# Altium PCB ATLAS_XP2V5_sredjen_bom.PcbDoc (part 2 of 4)
Units mil, origin at the board's own origin, x right, y up, seen from the top; angles counter-clockwise.
Board outline 6380 x 9190 mil, 4 copper layers (Primary Component Side, Ground Plane, Power Plane, Secondary Component Side), stack 35.4 mil thick; 203 components, 228 nets, 1212 pads, 912 vias.
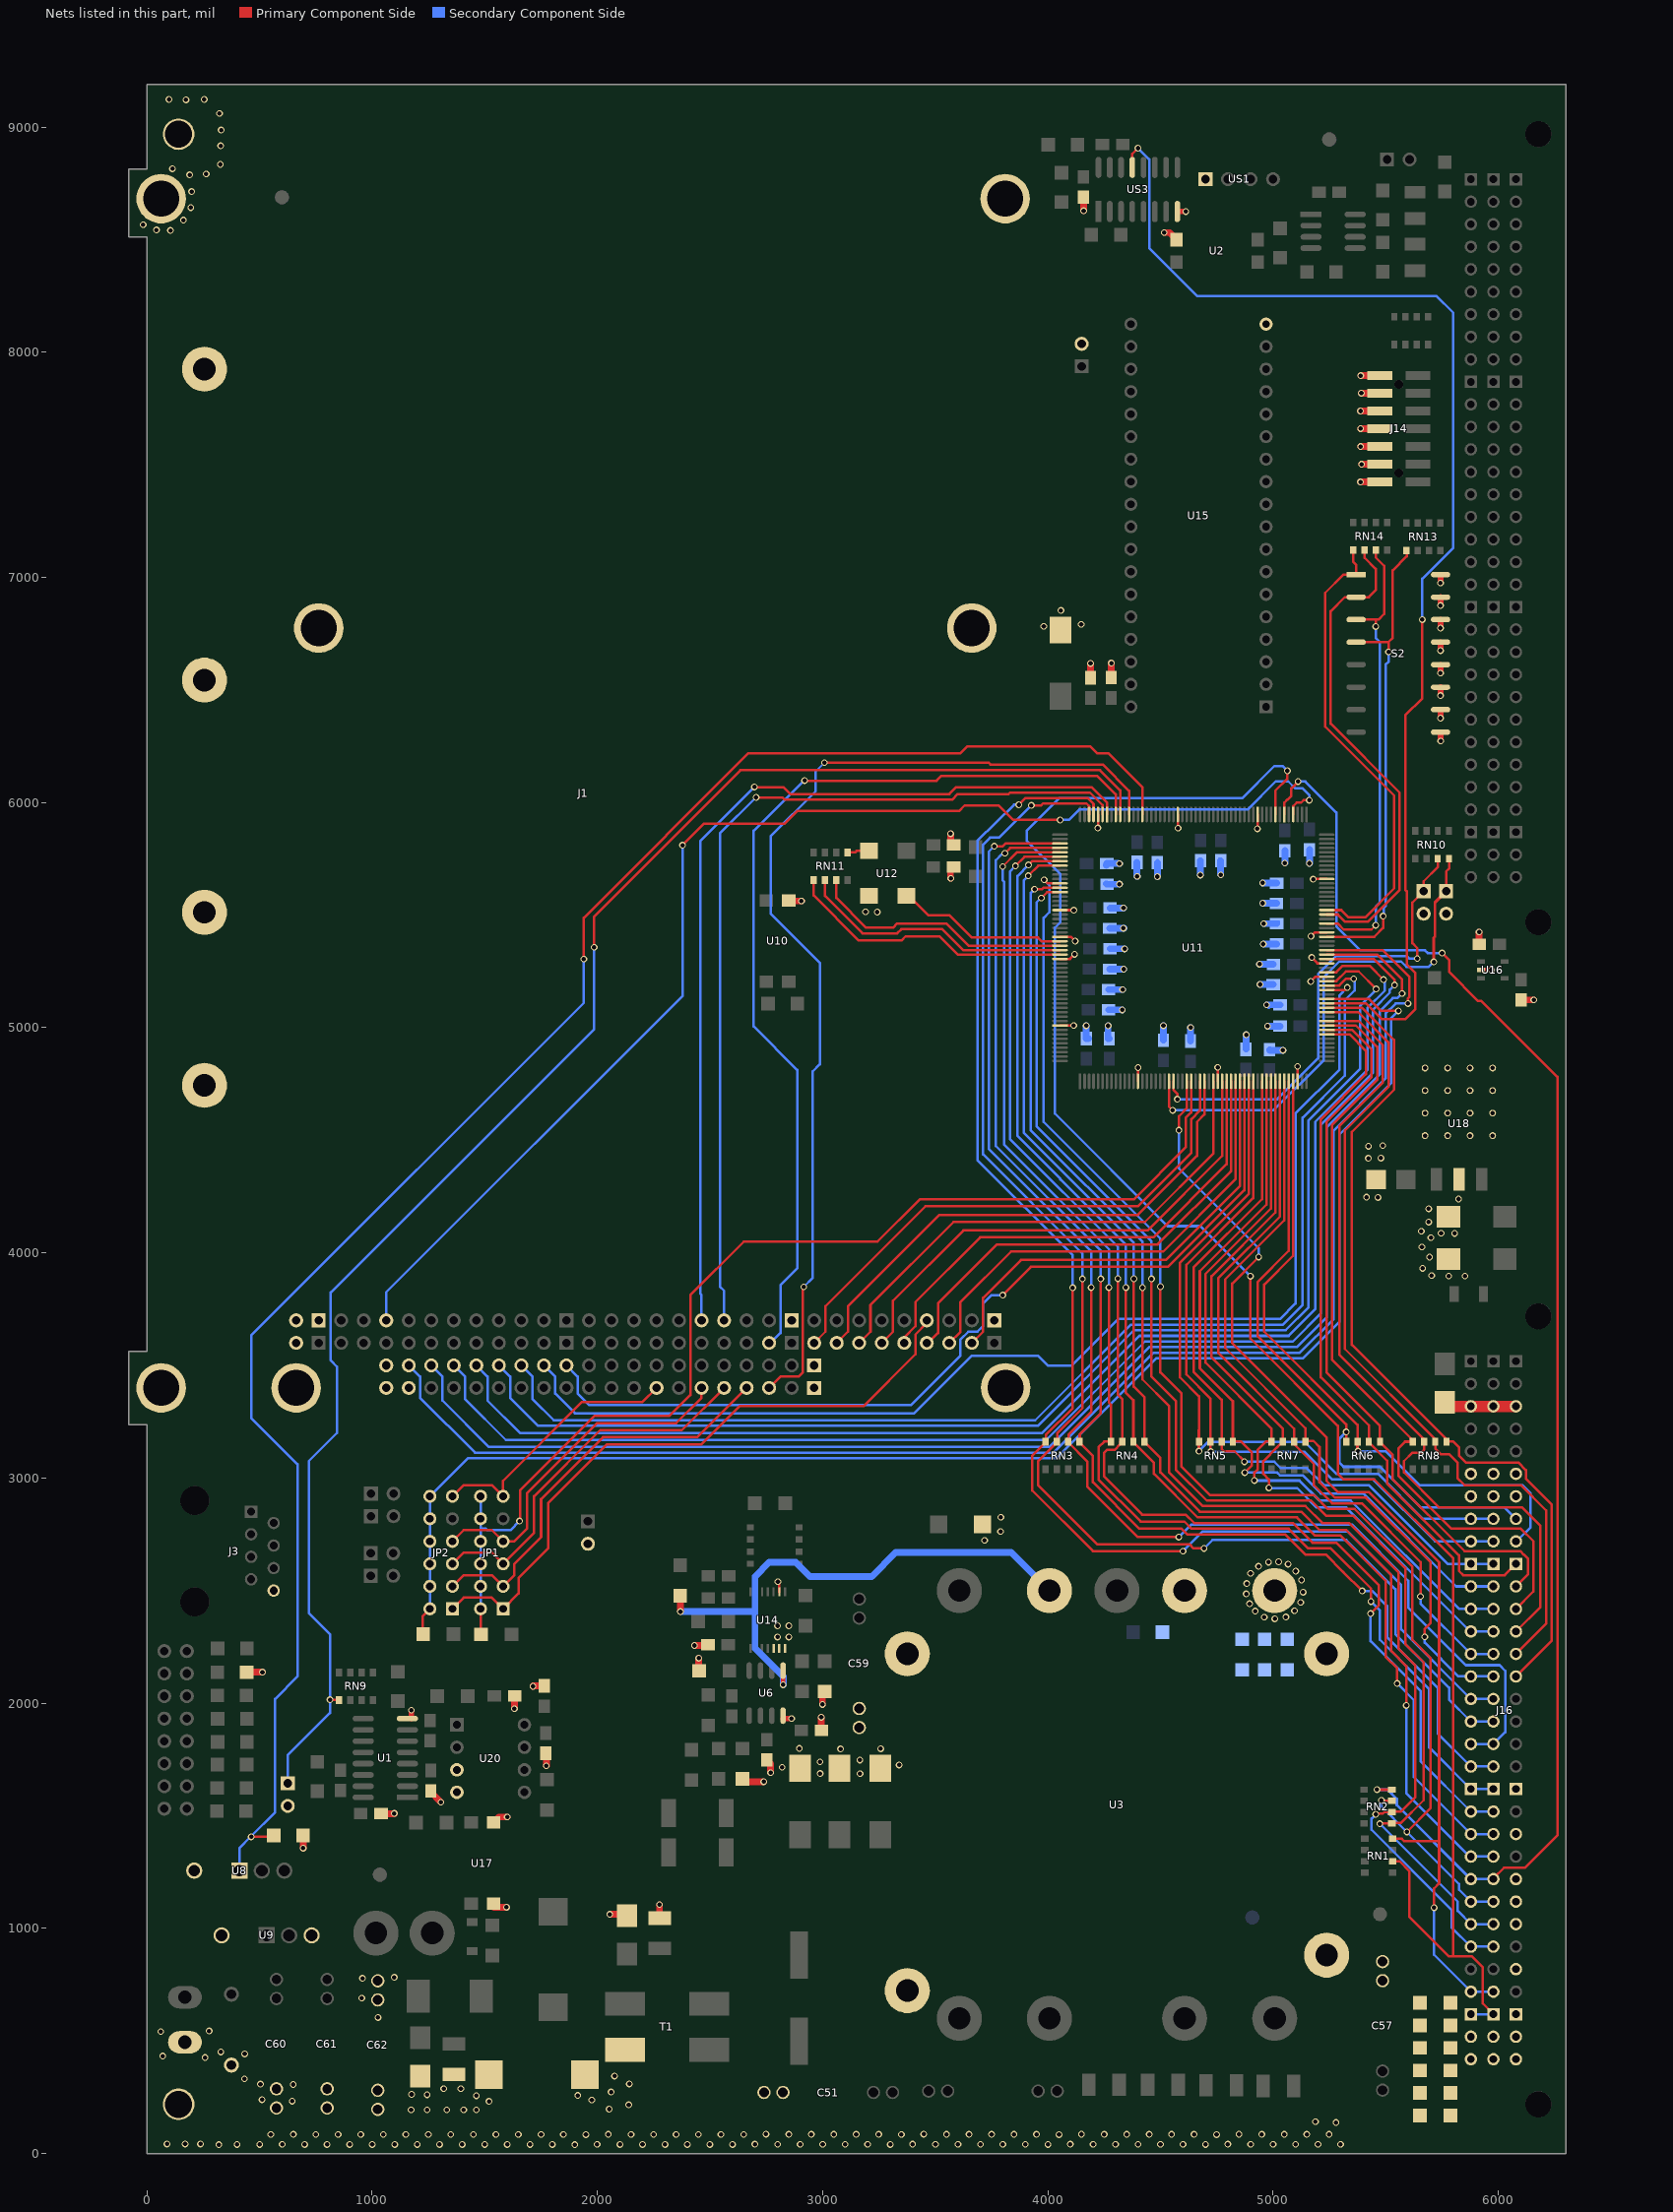
[diagram p4: the nets of this part, all layers, seen from the top]

## Via types
v1: diameter 30, hole 20, Primary Component Side to Secondary Component Side, 910 vias
v2: diameter 50, hole 28, Primary Component Side to Secondary Component Side, 2 vias

## Nets (pads, with @x,y where several pads share a name; then routed paths per layer and width w, separated by ;. In a path a pad name is that pad's centre, name@x,y a point inside that pad or via, vN(x,y) a via of type N, cw(c..) or ccw(c..) an arc to the next point about the centre after c; other vN are vias at no path point) (continued)
A2: RN13.5 S2.4 U11.81 | length 2144.4
  Primary Component Side w11: U11.81@5238.45,5404.1 5450,5404.1 5488.67,5442.77 v1(5488.67,5495.49) ; S2.4@5368.75,6712.5 5512.5,6712.5 ; v1(5512.5,6668.75) 5512.5,6712.5 ; RN13.5@5592.58,7118.82 5593.75,7119.75 5593.75,7093.75 5531.25,7031.25 5531.25,6731.25 5512.5,6712.5
  Secondary Component Side w11: v1(5488.67,5495.49) v1@5491,5489.99 ; v1(5512.5,6668.75) 5512.5,6625 5500,6612.5 5500,5540.25 5491,5531.25 v1@5491,5489.99 ; v1@5491,5489.99 5491.31,5489.25 5491,5489.25 v1@5491,5489.99
A3: RN14.7 S2.3 U11.84 | length 2044.5
  Primary Component Side w11: U11.84@5238.45,5463.2 5286.8,5463.2 5314,5436 5437,5436 v1(5456,5455) ; S2.3@5368.75,6812.5 5456,6812.5 ; v1(5456,6782) 5456,6812.5 ; RN14.7@5456.16,7121.18 5456.16,7088.68 5493.75,7051.09 5493.75,6837.5 5468.75,6812.5 5456,6812.5
  Secondary Component Side w11: v1(5456,5455) 5456,5537.5 5475,5556.5 5475,6712.5 5456,6731.5 v1(5456,6782)
A4: RN14.6 S2.2 U11.86 | length 2198
  Primary Component Side w11: U11.86@5238.45,5502.6 5287.5,5502.6 5320.1,5470 5420,5470 5562.5,5612.5 5562.5,6043.75 5256.25,6350 5256.25,6850 5318.75,6912.5 S2.2@5368.75,6912.5 5425,6912.5 5456.25,6943.75 5456.25,7037.5 5406.25,7087.5 RN14.6@5406.16,7121.18 RN14.6@5406.16,7121.18
A5: RN14.5 S2.1 U11.87 | length 2091.6
  Primary Component Side w11: U11.87@5238.45,5522.3 5302.7,5522.3 5335,5490 5408.75,5490 5537.5,5618.75 5537.5,6031.25 5231.25,6337.5 5231.25,6931.25 5312.5,7012.5 S2.1@5368.75,7012.5 5368.75,7056.25 5356.25,7068.75 5356.25,7087.5 5356.16,7087.59 RN14.5@5356.16,7121.18 RN14.5@5356.25,7119.75
ADDRESS_MAX_BUS0: J16.B16 J16.C16 RN3.8 U11.153 | length 6404.6
  Primary Component Side w11: v1(3871.02,5990.14) 3899.63,6018.75 4177.85,6018.75 4202.85,5993.75 U11.153@4202.85,5947.2 ; v1(4110.57,3845.26) 4110.57,3310.57 3991.6,3191.6 3991.6,3161.4 RN3.8@3990.2,3161.4 3990.2,3158.4 3931.25,3099.45 3931.25,2943.75 4200,2675 v1(4600,2675)
  Secondary Component Side w11: v1(3871.02,5990.14) 3850,5990.14 3687.5,5829.82 3687.5,4412.5 4110.48,3989.52 4110.48,3845.26 v1(4110.57,3845.26) ; v1(4600,2675) 4687.5,2762.5 5331.25,2762.5 5568.75,2525 5568.75,2328.25 J16.C16@5878.5,2018.5 J16.B16@5978.5,2018.5
ADDRESS_MAX_BUS1: J16.B17 J16.C17 RN3.7 U11.154 | length 6333.9
  Primary Component Side w11: v1(3927.06,5987.7) 3970.27,5987.7 3978.27,5995.7 4171.32,5995.7 4183.15,5983.87 U11.154@4183.15,5947.2 ; v1(4153.75,3884.68) 4153.75,3310 4041.6,3197.85 4041.6,3161.4 RN3.7@4040.2,3161.4 4040.2,3158.4 3956.25,3074.45 3956.25,2968.75 4218.75,2706.25 4628.19,2706.25 4646.94,2687.5 v1(4693.75,2687.5)
  Secondary Component Side w11: v1(3927.06,5987.7) 3783.11,5843.75 3743.75,5843.75 3712.5,5812.5 3712.5,4437.5 4153.61,3996.39 4153.61,3884.68 v1(4153.75,3884.68) ; v1(4693.75,2687.5) 4731.25,2725 5325,2725 5543.75,2506.25 5543.75,2306.25 5781.25,2068.75 5781.25,2015.75 J16.C17@5878.5,1918.5 J16.B17@5978.5,1918.5
ADDRESS_MAX_BUS2: J16.B18 J16.C18 RN3.6 U11.159 | length 6175.7
  Primary Component Side w11: v1(3762.5,5806.25) 3800,5806.25 3811.55,5817.8 U11.159@4053.75,5817.8 ; v1(4192.57,3845.86) 4192.57,3292.57 4091.6,3191.6 4091.6,3161.4 RN3.6@4090.2,3161.4 4090.2,3158.4 4175,3073.6 4175,2962.5 4399.97,2737.53 v1(4581.71,2737.53)
  Secondary Component Side w11: v1(3762.5,5806.25) 3737.5,5781.25 3737.5,4462.5 4192.61,4007.39 v1(4192.57,3845.86) ; v1(4581.71,2737.53) 4637.94,2793.75 5350,2793.75 5600,2543.75 5600,2425 5856.25,2168.75 6006.25,2168.75 6031.25,2143.75 6031.25,1871.25 J16.B18@5978.5,1818.5 J16.C18@5878.5,1818.5
ADDRESS_MAX_BUS3: J16.B19 J16.C19 RN3.5 U11.160 | length 5827.9
  Primary Component Side w11: v1(3809.25,5774.61) 3832.74,5798.1 U11.160@4053.75,5798.1 ; v1(4234.99,3884.2) 4234.99,3287.32 4141.6,3193.93 4141.6,3161.4 RN3.5@4140.2,3161.4 4140.2,3158.4 4200,3098.6 4200,2981.25 4406.25,2775 4593.75,2775 4618.75,2750 5053.67,2750 5143.75,2659.92 5233.83,2659.92 5311.57,2582.18 5311.81,2582.18 v1(5395.92,2498.07)
  Secondary Component Side w11: v1(3809.25,5774.61) 3793.75,5768.75 3768.75,5743.75 3768.75,4475 4235.17,4008.58 4235.17,3884.2 v1(4234.99,3884.2) ; v1(5395.92,2498.07) 5439.43,2498.07 5506.25,2431.25 5506.25,2293.75 5731.25,2068.75 5731.25,1865.75 J16.C19@5878.5,1718.5 J16.B19@5978.5,1718.5
ADDRESS_MAX_BUS4: J16.B20 J16.C20 RN4.8 U11.161 | length 5827.2
  Primary Component Side w11: v1(3799.34,5715.89) 3861.85,5778.4 U11.161@4053.75,5778.4 ; v1(4271.24,3846.16) 4271.24,3335.01 4279.91,3326.34 RN4.8@4279.91,3161.4 4250,3161.4 4225,3136.4 4225,2993.75 4412.5,2806.25 4606.25,2806.25 4637.5,2775 5068.75,2775 5156.25,2687.5 5256.25,2687.5 5434.92,2508.83 v1(5434.92,2451.12)
  Secondary Component Side w11: v1(3799.34,5715.89) 3799.34,5655 3805.61,5648.73 3805.61,4481.89 4271.62,4015.88 4271.62,3846.16 v1(4271.24,3846.16) ; v1(5434.92,2451.12) 5475,2411.04 5475,2281.25 5693.75,2062.5 5693.75,1803.25 J16.C20@5878.5,1618.5 J16.B20@5978.5,1618.5
ADDRESS_MAX_BUS5: J16.B21 J16.C21 RN4.7 U11.162 | length 5928.4
  Primary Component Side w11: v1(3856.45,5718.67) 3896.48,5758.7 U11.162@4053.75,5758.7 ; v1(4311.1,3885.11) 4311.47,3885.11 4311.47,3369.78 4329.91,3351.34 RN4.7@4329.91,3161.4 ; RN4.7@4329.91,3158.4 RN4.7@4329.91,3161.4 ; v1(5433.43,2398.03) 5468.75,2433.35 5468.75,2525 5281.25,2712.5 5175,2712.5 5087.5,2800 4650,2800 4612.5,2837.5 4418.75,2837.5 4250,3006.25 4250,3112.5 4262.5,3125 4296.51,3125 4321.41,3149.9 4321.41,3161.4 RN4.7@4329.91,3161.4
  Secondary Component Side w11: v1(3856.45,5718.67) 3831.25,5693.47 3831.25,4506.25 4311.53,4025.97 4311.53,3886.58 4311.47,3886.58 v1(4311.1,3885.11) ; v1(5433.43,2398.03) 5433.43,2275 5656.25,2052.18 5656.25,1740.75 J16.C21@5878.5,1518.5 J16.B21@5978.5,1518.5
ADDRESS_MAX_BUS6: J16.B22 J16.C22 RN4.6 U11.163 | length 5730
  Primary Component Side w11: v1(3914.41,5722.94) 3930.46,5739 U11.163@4053.75,5739 ; v1(4346.58,3846.16) 4346.58,3378.42 4379.91,3345.09 RN4.6@4379.91,3161.4 4379.91,3158.4 4471.38,3066.94 4471.38,3018.75 4665.12,2825 5106.25,2825 5187.5,2743.75 5300,2743.75 5500,2543.75 5500,2206.25 5550.74,2155.51 5550.74,2087.19 v1(5551.04,2087.48)
  Secondary Component Side w11: v1(3914.41,5722.94) 3865.37,5673.91 3865.37,4519.01 4055.83,4328.54 4055.83,4326.04 4346.92,4034.96 4346.92,3846.16 v1(4346.58,3846.16) ; v1(5551.04,2087.48) 5625,2013.52 5625,1672 J16.C22@5878.5,1418.5 J16.B22@5978.5,1418.5
ADDRESS_MAX_BUS7: J16.B23 J16.C23 RN4.5 U11.164 | length 5786.3
  Primary Component Side w11: v1(3913.18,5674.78) 3957.7,5719.3 U11.164@4053.75,5719.3 ; v1(4382.2,3884.81) 4381.9,3882.39 4381.9,3405.6 4429.91,3357.59 RN4.5@4429.91,3161.4 4429.91,3158.4 4500,3088.31 4500,3025 4675,2850 5125,2850 5206.25,2768.75 5325,2768.75 5525,2568.75 5525,2231.25 5591.19,2165.06 5591.19,1989.78 v1(5591.31,1989.78)
  Secondary Component Side w11: v1(3913.18,5674.78) 3893.75,5655.35 3893.75,4532.81 4381.91,4044.65 4381.91,3882.39 v1(4382.2,3884.81) ; v1(5591.31,1989.78) 5591.19,1918.68 5591.19,1601.15 5873.85,1318.5 J16.C23@5878.5,1318.5 J16.B23@5978.5,1318.5
ADJ: R41.2 U3.6 U6.5 | length 2471.8
  Primary Component Side w20: U6.5@2824.26,2144.45 2824.26,2081.76 v1(2824.66,2081.76)
  Primary Component Side w30: R41.2@2368.06,2477.16 2368.75,2477.16 v1(2368.75,2406.25)
  Secondary Component Side w30: v1(2368.75,2406.25) 2700,2406.25 ; v1(2824.66,2081.76) 2825,2081.76 2825,2118.75 2700,2243.75 2700,2406.25 ; U3.6@4007.09,2500 3838.09,2669 3324.5,2669 3218,2562.5 2943.75,2562.5 2881.25,2625 2762.5,2625 2700,2562.5 2700,2406.25
AEN: J1.A11 U11.148 | length 4243.2
  Primary Component Side w10.9: v1(2920,6098) 2921,6097 3506.25,6097 3528,6118.75 4218.75,6118.75 4301.35,6036.15 U11.148@4301.35,5947.2
  Secondary Component Side w10.9: J1.A11@2762.5,3600 2768.75,3600 2812.5,3643.75 2812.5,3856.25 2887.5,3931.25 2887.5,4812.5 2693.75,5006.25 2693.75,5875 2916.75,6098 v1(2920,6098)
ALE: J1.B28 U11.108 | length 5775.9
  Primary Component Side w10.9: v1(2378.14,5810.22) 2474.17,5906.25 2831.25,5906.25 2887.5,5962.5 3606.25,5962.5 3631.25,5987.5 3781.25,5987.5 3846.33,5922.42 3962.86,5922.42 v1(4054.58,5922.45) ; U11.108@5089.35,5947.2 5089.35,5983.87 5105.48,6000 5125,6000 5135.02,6010.02 v1(5160.51,6010.02)
  Secondary Component Side w10.9: J1.B28@1062.5,3700 1062.5,3825 2378,5140.5 2378,5810.22 v1(2378.14,5810.22) ; v1(4054.58,5922.45) 4093.2,5922.45 4139.51,5968.75 4887.5,5968.75 5012.5,6093.75 5067.49,6093.75 5098.74,6062.5 5131.25,6062.5 5160.51,6033.24 v1(5160.51,6010.02)
BALE: J16.B25 J16.C25 RN2.7 U11.168 | length 6183.7
  Primary Component Side w10.9: v1(3983.78,5656.47) 3984.66,5654.72 3998.88,5640.5 U11.168@4053.75,5640.5 ; v1(4499.99,3849.79) 4499.99,3468.76 4593.75,3375 4593.75,3050 4718.75,2925 5181.25,2925 5243.75,2862.5 5362.5,2862.5 5618.75,2606.25 5618.75,2281.25 5700,2200 5700,1534.17 v1(5594.19,1428.36) ; v1@5481.24,1568.13 v1(5481.25,1568.75) 5485.57,1565.82 RN2.7@5527.38,1565.82
  Secondary Component Side w10.9: v1(3983.78,5656.47) 3984.66,5654.72 4006.25,5633.13 4006.25,5512.5 3981.25,5487.5 3981.25,4581.25 4499.16,4063.34 4499.16,3849.79 v1(4499.99,3849.79) ; v1(5481.25,1568.75) 5481.25,1541.3 v1(5594.19,1428.36) 5826,1196.55 5826,1171 J16.C25@5878.5,1118.5 J16.B25@5978.5,1118.5
BASE_ADDR_JP0: J11.1 RN10.8 U11.21 | length 2291.8
  Primary Component Side w11: U11.21@4537.75,4762.5 4537.75,4649.24 v1(4554.25,4632.74) ; J11.1@5768.75,5606.25 5768.75,5693.75 5781.25,5706.25 5781.25,5751 RN10.8@5781.05,5751.1
  Primary Component Side w12: v1(5713.93,5292.53) 5713.93,5400 5718.75,5404.82 5718.75,5556.25 J11.1@5768.75,5606.25
  Secondary Component Side w11: v1(4554.25,4632.74) 5001.49,4632.74 5225,4856.25 5225,5225 5293.75,5293.75 5569,5293.75 5592.72,5270.03 5691.43,5270.03 v1(5713.93,5292.53)
BASE_ADDR_JP1: J13.1 RN10.7 U11.22 | length 2140.2
  Primary Component Side w11: U11.22@4557.45,4762.5 4557.45,4723.82 4575.02,4706.25 v1(4575.02,4682.36) ; v1(5640.2,5306.67) 5640.2,5353.55 5618.75,5375 5618.75,5556.25 J13.1@5668.75,5606.25 5668.75,5650 5731.25,5712.5 5731.25,5751 RN10.7@5731.05,5751.1
  Secondary Component Side w11: v1(4575.02,4682.36) 5018.75,4682.36 5200,4863.61 5200,5237.5 5281.25,5318.75 5593.75,5318.75 5605.83,5306.67 v1(5640.2,5306.67)
BIQ_1: J16.B29 J16.C29 RN1.8 U11.25 | length 5103
  Primary Component Side w11: v1(4581.97,4544.82) 4581.97,4606.97 4616.55,4641.55 U11.25@4616.55,4762.5 ; v1(4936.28,3981.24) 4936.22,3981.3 4818.75,3863.84 4818.75,3598.99 5237.5,3180.24 5237.5,2987.5 5287.5,2937.5 5425,2937.5 5737.5,2625 5737.5,1387.5 ; RN1.8@5530.79,1397.4 5571.34,1397.41 5581.25,1387.5 5737.5,1387.5 ; v1(5714.88,1091.42) 5714.88,1177.38 5737.5,1200 5737.5,1387.5
  Secondary Component Side w11: v1(4581.97,4544.82) 4581.97,4375 4936.28,4020.69 v1(4936.28,3981.24) ; v1(5714.88,1091.42) 5714.88,882.12 J16.C29@5878.5,718.5 J16.B29@5978.5,718.5
BIQ_2: J16.B30 J16.C30 RN1.6 U11.112 | length 8515.1
  Primary Component Side w11: v1(4899.42,3896.24) 4899.42,3619.33 5287.5,3231.25 5287.5,3018.75 5312.5,2993.75 5450,2993.75 5800,2643.75 5800,875 ; U11.112@5010.55,5947.2 5010.55,6053.08 5063.64,6106.17 v1(5063.64,6140.9) ; RN1.6@5530.79,1297.4 5562.5,1297.41 5606.25,1253.66 5606.25,1049.69 5780.94,875 5800,875 ; J16.B30@5978.5,618.5 5931.25,665.75 5931.25,827.27 5883.52,875 5800,875
  Secondary Component Side w11: v1(4899.42,3896.24) 4676.92,4118.75 4531.25,4118.75 4031.25,4618.75 4031.25,5443.75 4056.25,5468.75 4056.25,5681.25 3906.25,5831.25 3906.25,5875 4050,6018.75 4862.5,6018.75 5006.25,6162.5 5042.04,6162.5 v1(5063.64,6140.9) ; J16.C30@5878.5,618.5 J16.B30@5978.5,618.5
BRD: J16.B27 J16.C27 RN2.6 U11.169 | length 6287.2
  Primary Component Side w10.9: v1(3941.07,5615.31) 3975,5615.31 3980.49,5620.8 U11.169@4053.75,5620.8 ; v1(4420.41,3845.56) 4420.41,3437.75 4537.5,3320.66 4537.5,3025 4687.5,2875 5143.75,2875 5218.75,2800 5337.5,2800 5556.25,2581.25 5556.25,2243.75 5631.25,2168.75 5631.25,1581.25 5568.75,1518.75 5527.38,1518.75 RN2.6@5527.38,1515.82 5527.12,1516.09 5494.75,1516.09 5487.25,1508.59 5456.25,1508.59 v1(5456.25,1506.25)
  Secondary Component Side w10.9: v1(3941.07,5615.31) 3925,5599.25 3925,4543.75 4420.66,4048.09 4420.66,3845.56 v1(4420.41,3845.56) ; v1(5456.25,1506.25) 5437.5,1487.5 5437.5,1437.5 5793,1082 5793,1004 J16.C27@5878.5,918.5 J16.B27@5978.5,918.5
BRDY: J16.B24 J16.C24 RN2.8 U11.110 | length 6693.7
  Primary Component Side w11: U11.110@5049.95,5947.2 5049.95,5999.62 5062.82,6012.5 5064.24,6012.5 5081.25,6029.51 5081.25,6062.9 v1(5111.45,6093.09) ; v1(5750.53,5331.71) 5781.25,5300.99 5781.25,5248.22 5910.72,5118.75 5925,5118.75 6262.5,4781.25 6262.5,1412.5 6118.75,1268.75 6025,1268.75 5978.5,1222.25 J16.B24@5978.5,1218.5
  Primary Component Side w12: v1@5462.5,1616.09 v1(5461.69,1616.09) 5461.69,1615.82 RN2.8@5527.38,1615.82
  Secondary Component Side w11: v1(5111.45,6093.09) 5143.75,6093.09 5281.25,5955.59 5281.25,5450 5387.5,5343.75 5675,5343.75 5687.04,5331.71 v1(5750.53,5331.71) ; J16.C24@5878.5,1218.5 J16.B24@5978.5,1218.5
  Secondary Component Side w12: v1(5461.69,1616.09) 5508.91,1616.09 5550,1575 5550,1547 J16.C24@5878.5,1218.5
BWR: J16.B26 J16.C26 RN2.5 U11.170 | length 6116.4
  Primary Component Side w10.9: v1(3971,5576) 3996.1,5601.1 U11.170@4053.75,5601.1 ; v1(4460.57,3884.51) 4460.57,3450.18 4568.75,3342 4568.75,3037.5 4706.25,2900 5168.75,2900 5237.5,2831.25 5356.25,2831.25 5587.5,2600 5587.5,2262.5 5668.75,2181.25 5668.75,1568.75 5568.75,1468.75 5527.38,1468.75 RN2.5@5527.38,1465.82 v1@5474.2,1465.82 ; v1(5474.2,1464.14) v1@5474.2,1465.82 ; v1@5474.2,1466.09 v1@5474.2,1465.82
  Secondary Component Side w10.9: v1(3971,5576) 3969.75,5576 3950,5556.25 3950,4562.5 4460.75,4051.75 4460.75,3884.51 v1(4460.57,3884.51) ; v1(5474.2,1464.14) 5820,1118.34 5820,1077 J16.C26@5878.5,1018.5 J16.B26@5978.5,1018.5
CLK0: U11.181 U12.3 | length 770.9
  Primary Component Side w10.9: U12.3@3371.33,5586.04 3371.33,5589.53 3378.83,5589.53 3468.36,5500 3562.5,5500 3662.5,5400 3956.25,5400 3971.85,5384.4 U11.181@4053.75,5384.4
CLK1: RN11.3 U11.182 | length 1175.5
  Primary Component Side w11: RN11.3@3060.8,5655.49 3060.8,5576 3193.05,5443.75 3312.5,5443.75 3331.25,5462.5 3550,5462.5 3647.8,5364.7 U11.182@4053.75,5364.7
CLK2: RN11.2 U11.183 | length 1228.4
  Primary Component Side w11: RN11.2@3010.8,5655.49 3010.8,5585 3177.05,5418.75 3331.25,5418.75 3350,5437.5 3531.25,5437.5 3623.75,5345 U11.183@4053.75,5345
CLK3: RN11.1 U11.184 | length 1285.4
  Primary Component Side w11: RN11.1@2960.8,5655.49 2960.8,5587 3160.3,5387.5 3350,5387.5 3368.75,5406.25 3518.75,5406.25 3599.7,5325.3 U11.184@4053.75,5325.3
CW6: JP4.1 RN9.5 U11.147 | length 7305.2
  Primary Component Side w11: v1(812.74,2015.09) 812.74,2013.71 853.08,2013.71 RN9.5@853.08,2013.48 ; v1(1985.3,5357.22) 1985.3,5493.75 2635.3,6143.75 4231.25,6143.75 4321.05,6053.95 U11.147@4321.05,5947.2
  Secondary Component Side w11: JP4.1@625,1643.75 625,1768.75 812.74,1956.49 v1(812.74,2015.09) 812.74,2306.01 718.75,2400 718.75,3075 843.75,3200 843.75,3494.25 816,3522 816,3824 1985.3,4993.3 v1(1985.3,5357.22)
CW7_W/C: R12.1 U8.1 U11.142 | length 8135
  Primary Component Side w11: v1(462.5,1406.25) 562.5,1406.25 R12.1@562.5,1412.5 ; v1(1939.8,5305.01) 1939.8,5487.5 2671.05,6218.75 3612.5,6218.75 3643.75,6250 4187.5,6250 4218.75,6218.75 4268.75,6218.75 4419.55,6067.95 U11.142@4419.55,5947.2
  Secondary Component Side w11: U8.1@410,1256.25 410,1356.1 v1@461.33,1407.42 ; v1(462.5,1406.25) v1@461.33,1407.42 ; v1(1939.8,5305.01) 1939.8,5110.32 463,3633.52 463,3266.75 668.75,3061 668.75,2118.75 568.75,2018.75 568.75,1514.85 v1@461.33,1407.42
DATA_ISA0: J1.A9 U11.28 | length 2424.9
  Primary Component Side w11: J1.A9@2962.5,3600 3012.5,3650 3012.5,3762.5 3456.25,4206.25 4400,4206.25 4637.5,4443.75 4637.5,4593.75 4675.65,4631.9 U11.28@4675.65,4762.5
DATA_ISA1: J1.A8 U11.29 | length 2355.1
  Primary Component Side w11: J1.A8@3062.5,3600 3112.5,3650 3112.5,3762.5 3518.75,4168.75 4400,4168.75 4662.5,4431.25 4662.5,4581.25 4695.35,4614.1 U11.29@4695.35,4762.5
DATA_ISA2: J1.A7 U11.31 | length 2311.7
  Primary Component Side w11: J1.A7@3162.5,3600 3212.5,3650 3212.5,3768.75 3581.25,4137.5 4431.25,4137.5 4734.75,4441 U11.31@4734.75,4762.5
DATA_ISA3: J1.A6 U11.33 | length 2268.3
  Primary Component Side w11: J1.A6@3262.5,3600 3312.5,3650 3312.5,3787.5 3625,4100 4443.75,4100 4774.15,4430.4 U11.33@4774.15,4762.5
DATA_ISA4: J1.A5 U11.34 | length 2205.7
  Primary Component Side w11: J1.A5@3362.5,3600 3362.5,3625 3412.5,3675 3412.5,3781.25 3700,4068.75 4468.75,4068.75 4793.85,4393.85 U11.34@4793.85,4762.5
DATA_ISA5: J1.A4 U11.35 | length 2143.4
  Primary Component Side w11: J1.A4@3462.5,3600 3468.75,3600 3512.5,3643.75 3512.5,3775 3775,4037.5 4487.83,4037.5 4812.25,4361.92 4813.55,4363.22 U11.35@4813.55,4762.5
DATA_ISA6: J1.A3 U11.36 | length 2084.6
  Primary Component Side w11: J1.A3@3562.5,3600 3612.5,3648.75 3612.5,3781.25 3837.5,4006.25 4512.5,4006.25 4833.25,4327 U11.36@4833.25,4762.5
DATA_ISA7: J1.A2 U11.37 | length 2032.7
  Primary Component Side w11: J1.A2@3662.5,3600 3712.5,3650 3712.5,3800 3881.25,3968.75 4525,3968.75 4852.95,4296.7 U11.37@4852.95,4762.5
DATA_ISA8: J1.C11 U11.38 | length 4106.6
  Primary Component Side w11: v1(3800,3812.5) 3925,3937.5 4532.16,3937.5 4872.65,4277.99 U11.38@4872.65,4762.5
  Secondary Component Side w11: J1.C11@1862.5,3500 1912.5,3450 1912.5,3375 1962.5,3325 3393.75,3325 3612.5,3543.75 3612.5,3615.76 3646.74,3650 3687.5,3650 3712.5,3675 3712.5,3775 3750,3812.5 v1(3800,3812.5)
DATA_ISA9: J1.C12 U11.69 | length 5302.2
  Primary Component Side w11: U11.69@5238.45,5167.7 5318.92,5167.7 v1(5329.78,5178.56)
  Secondary Component Side w11: J1.C12@1762.5,3500 1812.5,3450 1812.5,3375 1900,3287.5 3406.25,3287.5 3662.5,3543.75 3956.25,3543.75 4000,3500 4106.25,3500 4312.5,3706.25 5031.25,3706.25 5100,3775 5100,4618.75 5293.75,4812.5 5293.75,5142.53 v1(5329.78,5178.56)
DATA_ISA10: J1.C13 U11.70 | length 5519.4
  Primary Component Side w11: U11.70@5238.45,5187.4 5293.75,5187.4 5323.95,5217.6 v1(5357.95,5217.6)
  Secondary Component Side w11: J1.C13@1662.5,3500 1712.5,3450 1712.5,3350 1806.25,3256.25 3943.75,3256.25 4368.75,3681.25 5043.75,3681.25 5131.25,3768.75 5131.25,4600 5318.75,4787.5 5318.75,5121.69 5362.5,5165.44 5362.5,5211.9 5360.07,5214.33 5359.74,5214.01 v1(5357.95,5217.6)
DATA_ISA11: J1.C14 U11.71 | length 5788.6
  Primary Component Side w11: U11.71@5238.45,5207.1 5281.25,5207.1 5324.15,5250 5379.93,5250 v1(5457.77,5172.16)
  Secondary Component Side w11: J1.C14@1562.5,3500 1612.5,3450 1612.5,3356.25 1737.5,3231.25 3956.25,3231.25 4381.25,3656.25 5056.25,3656.25 5156.25,3756.25 5156.25,4587.5 5387.5,4818.75 5387.5,5097.52 5458.49,5168.5 5458.49,5172.16 v1(5457.77,5172.16)
DATA_ISA12: J1.C15 U11.73 | length 6022.9
  Primary Component Side w11: U11.73@5238.45,5246.5 5281.25,5246.5 5309.75,5275 5428.75,5275 5490.13,5212.88 5490.51,5212.5 v1(5490.51,5213.25)
  Secondary Component Side w11: J1.C15@1462.5,3500 1512.5,3450 1512.5,3343.75 1656.25,3200 3975,3200 4406.25,3631.25 5068.75,3631.25 5187.5,3750 5187.5,4581.25 5418.75,4812.5 5418.75,5087.5 5496.14,5164.89 5496.14,5205.25 v1(5490.51,5213.25)
DATA_ISA13: J1.C16 U11.76 | length 6235.5
  Primary Component Side w11: U11.76@5238.45,5305.6 5446.63,5305.6 5539.07,5213.16 5539.07,5189.46 v1(5539.55,5189.46)
  Secondary Component Side w11: J1.C16@1362.5,3500 1412.5,3450 1412.5,3350 1593.75,3168.75 3993.75,3168.75 4431.25,3606.25 5087.5,3606.25 5212.5,3731.25 5212.5,4568.75 5443.75,4800 5443.75,5081.25 5518.75,5156.25 5518.75,5168.66 v1(5539.55,5189.46)
DATA_ISA14: J1.C17 U11.77 | length 6459.6
  Primary Component Side w11: U11.77@5238.45,5325.3 5462.5,5325.3 5573.08,5214.72 v1(5573.08,5151.88)
  Secondary Component Side w11: J1.C17@1262.5,3500 1312.5,3450 1312.5,3343.75 1518.75,3137.5 4006.25,3137.5 4450,3581.25 5106.25,3581.25 5237.5,3712.5 5237.5,4556.25 5475,4793.75 5475,5075 5531.25,5131.25 5552.45,5131.25 v1(5573.08,5151.88)
DATA_ISA15: J1.C18 U11.78 | length 6675.5
  Primary Component Side w11: U11.78@5238.45,5345 5486.25,5345 5606.25,5225 5606.25,5137.5 5599.16,5130.41 v1(5599.16,5107.24)
  Secondary Component Side w11: J1.C18@1162.5,3500 1212.5,3450 1212.5,3356.25 1456.25,3112.5 4025,3112.5 4468.75,3556.25 5118.75,3556.25 5268.75,3706.25 5268.75,4543.75 5500,4775 5500,5062.5 5544.74,5107.24 v1(5599.16,5107.24)
DATA_MAX_BUS0: J16.B8 J16.C8 RN5.8 U11.39 | length 3271.4
  Primary Component Side w11: RN5.8@4671.5,3161.4 4670.67,3162.24 4670.67,3212.34 4670.83,3212.5 4670.83,3363.17 4587.5,3446.5 4587.5,3956.25 4892.35,4261.1 U11.39@4892.35,4762.5
  Primary Component Side w12: v1(4670.94,3119.14) 4670.94,3160.41 4671.5,3160.41 RN5.8@4671.5,3161.4
  Secondary Component Side w11: 4712.21,3160.41 5139.59,3160.41 5281.25,3018.75 5465.49,3018.75 5665.74,2818.5 J16.C8@5878.5,2818.5 J16.B8@5978.5,2818.5
  Secondary Component Side w12: v1(4670.94,3119.14) 4712.21,3160.41
DATA_MAX_BUS1: J16.B9 J16.C9 RN5.7 U11.40 | length 3233.6
  Primary Component Side w11: RN5.7@4721.5,3161.4 4721.5,3353.5 4615,3460 4615,3946.25 4912.05,4243.3 U11.40@4912.05,4762.5
  Primary Component Side w12: RN5.7@4721.5,3161.4 4721.5,3118.92 v1(4723.54,3116.88)
  Secondary Component Side w11: v1(4723.54,3116.88) 5139.37,3116.88 5262.5,2993.75 5444.67,2993.75 5719.92,2718.5 J16.C9@5878.5,2718.5 J16.B9@5978.5,2718.5
DATA_MAX_BUS2: J16.B10 J16.C10 RN5.6 U11.42 | length 3235.4
  Primary Component Side w11: v1(4872.83,3072.1) 4875.67,3072.1 4829.02,3118.75 4781.65,3118.75 4771.5,3128.9 RN5.6@4771.5,3161.4 4771.5,3347.25 4647,3471.75 4647,3934.5 4951.45,4238.95 U11.42@4951.45,4762.5
  Secondary Component Side w11: v1(4872.83,3072.1) 5006.25,3072.1 5034.6,3043.75 5150,3043.75 5225,2968.75 5424.56,2968.75 5774.81,2618.5 J16.C10@5878.5,2618.5 J16.B10@5978.5,2618.5
DATA_MAX_BUS3: J16.B11 J16.C11 RN5.5 U11.43 | length 3304.6
  Primary Component Side w11: RN5.5@4821.5,3161.4 RN5.5@4821.5,3162.5 ; v1(4874.74,3023.96) 4906.25,3055.47 4906.25,3112.5 4856.25,3162.5 RN5.5@4821.5,3162.5 ; U11.43@4971.15,4762.5 4971.15,4214.9 4675,3918.75 4675,3487.5 4821.5,3341 RN5.5@4821.5,3162.5
  Secondary Component Side w11: v1(4874.74,3023.96) 5018.75,3023.96 5030.21,3012.5 5131.25,3012.5 5212.5,2931.25 5400,2931.25 5812.75,2518.5 J16.C11@5878.5,2518.5 J16.B11@5978.5,2518.5
DATA_MAX_BUS4: J16.B12 J16.C12 RN7.8 U11.44 | length 3359.5
  Primary Component Side w11: v1(4917.35,2988.92) 4917.35,3023.6 4931.25,3037.5 4931.25,3123.9 4968.75,3161.4 RN7.8@4993.76,3161.4 4993.75,3218.75 4700,3512.5 4700,3906.25 4990.85,4197.1 U11.44@4990.85,4762.5
  Secondary Component Side w11: 5344.76,2900 5826.26,2418.5 J16.C12@5878.5,2418.5 J16.B12@5978.5,2418.5
  Secondary Component Side w12: v1(4917.35,2988.92) 5117.33,2988.92 5206.25,2900 5344.76,2900
DATA_MAX_BUS5: J16.B13 J16.C13 RN7.7 U11.45 | length 3363.8
  Primary Component Side w11: v1(4981.25,2956.25) 4981.25,2993.75 4956.25,3018.75 4956.25,3073.8 5018.75,3136.3 5018.75,3136.39 RN7.7@5043.76,3161.4 5043.75,3218.75 4727,3535.5 4727,3895.75 5010.55,4179.3 U11.45@5010.55,4762.5
  Secondary Component Side w11: v1(4981.25,2956.25) 4981.25,2954.75 5107.75,2954.75 5193.75,2868.75 5325,2868.75 5875.25,2318.5 J16.C13@5878.5,2318.5 J16.B13@5978.5,2318.5
DATA_MAX_BUS6: J16.B14 J16.C14 RN7.6 U11.46 | length 3299.2
  Primary Component Side w11: U11.46@5030.25,4762.5 5030.25,4160.89 4756.25,3886.89 4756.25,3556.25 5093.75,3218.75 RN7.6@5093.76,3161.4 5093.76,3150 5181.25,3062.51 5181.25,2968.75 5262.5,2887.5 5393.75,2887.5 5654.53,2626.72 v1(5654.53,2473.93)
  Secondary Component Side w11: v1(5654.53,2473.93) 5654.53,2442.47 J16.C14@5878.5,2218.5 J16.B14@5978.5,2218.5
DATA_MAX_BUS7: J16.B15 J16.C15 RN7.5 U11.47 | length 3466.8
  Primary Component Side w11: U11.47@5049.95,4762.5 5049.95,4144.97 4787.5,3882.52 4787.5,3577.62 5143.75,3221.37 RN7.5@5143.76,3161.4 5143.76,3164.85 5178.9,3164.85 5206.25,3137.5 5206.25,2981.25 5275,2912.5 5412.5,2912.5 5699.72,2625.28 5699.72,2356.25 5673.42,2329.95 5673.42,2294.42 v1(5673.32,2294.42)
  Secondary Component Side w11: v1(5673.32,2294.42) 5673.32,2268.75 5823.57,2118.5 J16.C15@5878.5,2118.5 J16.B15@5978.5,2118.5
DATA_MAX_BUS8: J16.A8 RN6.8 U11.48 | length 2858.9
  Primary Component Side w11: U11.48@5069.65,4762.5 5069.65,4008.85 4931.25,3870.45 4931.25,3631.56 5325,3237.81 v1(5325.04,3204.65) ; RN6.8@5325,3161.4 RN6.8@5325.05,3161.4
  Primary Component Side w12: RN6.8@5325.05,3161.4 v1@5325.05,3204.65
  Secondary Component Side w11: 5656.25,2868.75 6028.25,2868.75 J16.A8@6078.5,2818.5
  Secondary Component Side w12: v1(5325.04,3204.65) 5293.75,3173.37 5293.75,3068.75 5312.5,3050 5475,3050 5656.25,2868.75
DATA_MAX_BUS9: J16.A9 RN6.7 U11.49 | length 2970.2
  Primary Component Side w11: U11.49@5089.35,4762.5 5089.35,3987.3 4961.05,3859 4961.05,3650 5375,3236.05 5375,3161.4 RN6.7@5375.05,3161.4
  Primary Component Side w12: RN6.7@5375.05,3161.4 v1@5375.05,3117.45 ; v1(5377.54,3119.36) v1@5375.05,3117.45 ; v1@5375.05,3117.45 5375.05,3112.5 5375,3112.5 5372.63,3115.58 5375,3117.41 v1@5375.05,3117.45
  Secondary Component Side w11: v1(5377.54,3119.36) 5499.37,3119.38 5650,2968.75 6106.25,2968.75 6143.75,2931.25 6143.75,2781.25 6081,2718.5 J16.A9@6078.5,2718.5
DATA_MAX_BUS10: J16.A10 RN6.6 U11.59 | length 3132.6
  Primary Component Side w11: U11.59@5238.45,4970.7 5339,4970.7 5412.5,4897.2 5412.5,4793.75 5212.5,4593.75 5212.5,3446.88 5425,3234.38 5425,3161.4 RN6.6@5425.05,3161.4 ; RN6.6@5425.05,3158.4 5506.25,3077.2 5506.25,2975 5825,2656.25 5825,2587.5 5843.75,2568.75 6028.75,2568.75 J16.A10@6078.5,2618.5
  Primary Component Side w12: RN6.6@5425.05,3158.4 RN6.6@5425.05,3161.4
DATA_MAX_BUS11: J16.A11 RN6.5 U11.60 | length 3243.4
  Primary Component Side w11: U11.60@5238.45,4990.4 5350,4990.4 5437.5,4902.9 5437.5,4781.25 5237.5,4581.25 5237.5,3468.75 5475,3231.25 5475,3161.4 RN6.5@5475.05,3161.4 ; RN6.5@5475.05,3158.4 5531.25,3102.2 5531.25,2993.75 5850,2675 6098.39,2675 6114.3,2659.09 6114.83,2659.09 6131.25,2642.67 6131.25,2571.25 J16.A11@6078.5,2518.5
  Primary Component Side w12: RN6.5@5475.05,3158.4 RN6.5@5475.05,3161.4
  Secondary Component Side w11: J16.A11@6078.5,2518.5 J16.A11@6078.5,2521.5
DATA_MAX_BUS12: J16.A12 RN8.8 U11.61 | length 3513.1
  Primary Component Side w11: U11.61@5238.45,5010.1 5367,5010.1 5462.5,4914.6 5462.5,4768.75 5262.5,4568.75 5262.5,3525 5611.65,3175.85 RN8.8@5611.65,3161.4 ; 5586.4,3161.4 5556.25,3131.25 5556.25,3011 5792.25,2775 6100,2775 6156.25,2718.75 6156.25,2496.25 J16.A12@6078.5,2418.5 ; RN8.8@5620.15,3158.19 RN8.8@5620.15,3161.4
  Primary Component Side w12: 5586.4,3161.4 5611.65,3161.4 RN8.8@5620.15,3161.4
  Secondary Component Side w11: J16.A12@6078.5,2418.5 J16.A12@6078.5,2434
DATA_MAX_BUS13: J16.A13 RN8.7 U11.62 | length 3705.4
  Primary Component Side w11: U11.62@5238.45,5029.8 5380,5029.8 5487.5,4922.3 5487.5,4756.25 5293.75,4562.5 5293.75,3549 5670.15,3172.6 5670.15,3125 5657.65,3112.5 5618.75,3112.5 5581.25,3075 5581.25,3025 5737.5,2868.75 6106.25,2868.75 6187.5,2787.5 6187.5,2427.5 J16.A13@6078.5,2318.5
DATA_MAX_BUS14: J16.A14 RN8.6 U11.64 | length 3720.3
  Primary Component Side w11: U11.64@5238.45,5069.2 5378,5069.2 5512.5,4934.7 5512.5,4737.5 5318.75,4543.75 5318.75,3573.25 5720.15,3171.85 5720.15,3129.85 5743.75,3106.25 5781.25,3106.25 5818.75,3068.75 5818.75,3000 5850,2968.75 6100,2968.75 6212.5,2856.25 6212.5,2352.5 J16.A14@6078.5,2218.5
DATA_MAX_BUS15: J16.A15 RN8.5 U11.65 | length 3850.4
  Primary Component Side w11: U11.65@5238.45,5088.9 5394,5088.9 5537.5,4945.4 5537.5,4725 5350,4537.5 5350,3591.72 5770.15,3171.57 RN8.5@5770.15,3161.4 5800,3161.4 5825,3136.4 5825,3100 5856.25,3068.75 6089.06,3068.75 6123.11,3034.7 6123.11,2996.57 6237.5,2882.17 6237.5,2277.5 J16.A15@6078.5,2118.5
E/D: RN11.5 U12.1 | length 99.7
  Primary Component Side w11: RN11.5@3110.8,5778.49 3145.49,5778.49 3151,5784 3151,5785.71 3151.33,5786.04 U12.1@3206.33,5786.04
GND: C3.2 C4.2 C6.2 C7.2 C9.2 C10.2 C13.2 C14.2 C15.2 C16.2 C17.2 C18.2 C19.2 C20.2 C21.2 C22.2 C23.2 C24.2 C25.2 C26.2 C27.2 C28.2 C29.2 C30.2 C31.2 C32.2 C33.2 C34.2 C35.2 C36.2 C37.2 C38.2 C39.2 C40.2 C42.2 C43.2 C46.2 C47.2 C48.2 C49.2 C50.2 C52.2 C56.2 C66.2 C67.2 C68.2 C69.2 C70.2 C102.2 C103.2 D3.1 D5.2 J1.A32 J1.B1 J1.B10 J1.B31 J1.B32 J1.C0 J1.C19 J1.D0 J1.D18 J1.D19 J1.MTH1 J1.MTH2 J1.MTH3 J1.MTH4 J1.MTH5 J1.MTH6 J1.MTH7 J2.1 J3.8 J9.1 J10.1 J11.2 J12.1 J13.2 J14.1 J14.3 J14.5 J14.7 J14.9 J14.11 J14.13 J16.A3 J16.A6 J16.A7 J16.A20 J16.A22 J16.A24 J16.A25 J16.A26 J16.A28 J16.A30 J16.A31 J16.A32 J16.B3 J16.B6 J16.B7 J16.B31 J16.B32 J16.C3 J16.C6 J16.C7 J16.C31 J16.C32 J18.2 JP4.2 JP5.2 R9.2 R12.2 R23.2 R29.1 R33.2 R34.2 R35.2 R36.2 R40.1 R43.1 R45.2 R46.2 R47.2 R48.2 R49.2 S2.9 S2.10 S2.11 S2.12 S2.13 S2.14 S2.15 S2.16 U1.8 U2.3 U3.8 U3.9 U5.1 U6.4 U8.4 U9.3 U9.4 U10.3 U11.14 U11.32 U11.50 U11.72 U11.75 U11.82 U11.94 U11.116 U11.134 U11.152 U11.174 U11.180 U11.185 U11.200 U12.2 U14.5 U14.6 U14.7 U14.9 U15.18 U16.2 U17.3 U18.2 U18.5 U18.7 U18.10 U18.12 U18.14 U18.21 U18.23 U18.25 U18.27 U18.29 U18.37 U18.39 U18.41 U18.49 U18.51 U18.53 U20.3 U20.4 US1.1 US3.8 | length 5822.5
  Primary Component Side w11: U1.8@1156.25,1931.25 U1.8@1174.07,1931.25 ; v1(1773.06,1721.94) v1@1773.27,1721.94 ; R29.1@2450,2143.75 R29.1@2451.25,2143.75 ; R43.1@2643.75,1650.85 R43.1@2643.75,1663.75 ; v1(2801.64,2539.09) 2803.15,2540.6 2807.67,2536.08 U14.9@2807.67,2494.27 ; U6.4@2824.26,1931.25 U6.4@2824.26,1944.45 ; U10.3@2849.89,5562.5 U10.3@2849.89,5564.69 ; C4.2@2993.75,1878.86 C4.2@2994.92,1878.86 ; U11.200@4053.75,5010.1 v1@4115.52,5010.1 ; U11.185@4053.75,5305.6 4098.39,5305.6 v1(4118.76,5325.98) ; U11.180@4053.75,5404.1 4101.77,5404.1 v1(4121.42,5384.45) ; U11.174@4053.75,5522.3 4115.7,5522.3 4115.86,5522.14 v1(4115.48,5521.77) ; C52.2@4056.25,6766.25 C52.2@4056.25,6768.75 ; v1(4115.1,5009.67) v1@4115.52,5010.1 ; v1(4222.3,5887.12) 4223.82,5888.63 4222.55,5889.9 U11.152@4222.55,5947.2 ; U11.14@4399.85,4762.5 4400,4819.05 4400,4822.58 v1(4400.54,4822.58) ; U11.134@4577.15,5947.2 4577.15,5886.4 v1(4578.05,5886.39) ; v1(4754.11,4823.51) 4754.45,4823.51 U11.32@4754.45,4762.5 ; v1(4930.46,5883.69) 4931.75,5884.98 U11.116@4931.75,5947.2 ; U11.50@5109.05,4762.5 v1(5109.05,4828.45) ; v1(5167.43,5205.24) 5169.49,5207.5 5188.79,5226.8 U11.72@5238.45,5226.8 ; v1(5168.75,5406.25) 5186.3,5423.8 U11.82@5238.45,5423.8 ; v1(5171.58,5311.76) 5197.44,5285.9 U11.75@5238.45,5285.9 ; v1(5178.21,5659.5) 5177.18,5660.2 U11.94@5238.45,5660.2 ; v1@5381.25,7657.53 v1(5388.88,7660.71) ; v1@5385.54,7816.01 v1(5392.19,7818.25) ; v1@5387.5,7500.05 v1(5393.02,7502.35) ; v1@5743.75,6274.04 v1(5744.4,6273.39) ; U16.2@5922.76,5256.25 U16.2@5930.26,5256.25 ; v1@4115.52,5010.1 4116.35,5010.1 4115.94,5010.51 v1@4115.52,5010.1
  Primary Component Side w20: U16.2@5930.26,5256.25 v1(5968.75,5256.25)
  Primary Component Side w25: U1.8@1174.07,1931.25 v1(1174.07,1968.77) ; U6.4@2824.26,1931.25 v1(2862.5,1931.25) ; US3.8@4575,8625 v1(4612.5,8625) ; v1@5743.75,6274.04 S2.9@5743.75,6312.5 ; v1(5743.75,6375) S2.10@5743.75,6412.5 ; v1(5743.75,6475) S2.11@5743.75,6512.5 ; v1(5743.75,6575) S2.12@5743.75,6612.5 ; v1(5743.75,6675) S2.13@5743.75,6712.5 ; v1(5743.75,6775) S2.14@5743.75,6812.5 ; v1(5743.75,6875) S2.15@5743.75,6912.5 ; v1(5743.75,6975) S2.16@5743.75,7012.5
  Primary Component Side w30: R23.2@442.5,2137.5 v1(512.5,2137.5) ; R12.2@692.5,1412.5 693.75,1412.5 v1(693.75,1356.25) ; C6.2@1039.17,1509 1098,1509 v1(1098,1510) ; C10.2@1260.38,1610.45 1260.38,1605.69 v1(1305,1560) ; U17.3@1539.48,1469.51 1564.56,1494.59 v1(1599.7,1494.59) ; v1(1631.25,1975) 1631.25,2031.25 C56.2@1632.5,2031.25 ; v1(1713.98,2074.64) 1713.98,2076.65 C103.2@1764.13,2076.65 ; C102.2@1769.99,1777.05 1769.99,1781.25 1773.27,1781.25 v1@1773.27,1721.94 ; v1(2431.25,2256.25) 2490.94,2256.25 C43.2@2490.94,2259.15 ; R29.1@2450,2143.75 v1(2450,2200) ; R43.1@2643.75,1650.85 v1(2738.65,1650.85) ; C3.2@2752,1748.02 2769.11,1730.91 v1(2769.11,1691.26) ; U10.3@2849.89,5562.5 v1(2906.25,5562.5) ; C4.2@2993.75,1878.86 v1(2993.75,1937.5) ; v1(2999.45,1994.34) 2999.45,2041.95 R40.1@3009,2051.5 ; v1(3568.41,5861.54) 3568.73,5852.86 3568.75,5802.49 3570.44,5802.49 C48.2@3582.22,5811.38 ; v1(3569.05,5663.18) 3568,5663.18 3568,5714.22 C39.2@3581.5,5714.22 ; C7.2@4158.61,8689 4158.61,8628 v1(4159,8628) ; v1(4189.59,6617.79) 4189.71,6617.79 C46.2@4189.71,6554.11 ; C9.2@4281.56,6554.86 4281.56,6619 v1(4282,6619) ; v1(4516.57,8531.57) 4539.68,8531.57 U2.3@4571.25,8500 ; v1(5388,7424) 5388,7424.18 J14.13@5473.96,7424.18 J14.13@5468.75,7421.32 ; v1(5388,7739) 5388,7739.11 J14.5@5473.96,7739.11 ; v1(5388.88,7660.71) 5388.88,7660.4 J14.7@5473.96,7660.4 ; v1(5389,7581) 5389,7581.61 J14.9@5473.96,7581.61 J14.9@5468.75,7578.75 ; v1(5389.6,7895.91) 5390,7895.91 5390,7896.61 J14.1@5473.96,7896.61 J14.1@5468.75,7893.75 ; v1(5392.19,7818.25) 5392.2,7817.91 J14.3@5473.96,7817.91 J14.3@5468.75,7816.01 ; v1@5392.9,7502.35 v1(5393.02,7502.35) J14.11@5472.94,7502.35 ; J14.11@5468.75,7500.05 J14.11@5472.94,7502.35 ; v1(5915,5425) 5915,5370 C13.2@5915.7,5370 ; C49.2@6101.69,5123.15 6101.69,5123 v1(6158,5123) ; J14.11@5472.94,7502.35 5473.4,7502.35 J14.11@5473.96,7502.91 J14.11@5472.94,7502.35
  Primary Component Side w50: D3.1@5763.41,3336.08 5763.41,3318.5 J16.C3@5878.5,3318.5 J16.B3@5978.5,3318.5 J16.A3@6078.5,3318.5
  Secondary Component Side w11: v1(4170.74,5009.15) 4171.16,5009.25 v1@4172.08,5009.46 ; v1@4258.3,5011.79 v1(4267.64,5008.55) ; v1@4312.5,5639.14 4317.5,5638.87 v1(4317.94,5637.42) ; v1@4312.5,5720.46 4312.5,5719.98 v1(4318.31,5728.64) ; C20.2@4486.34,5733.33 4487.78,5745.04 C20.2@4486.57,5745.04 ; v1(4513.32,5009.11) v1@4517.89,5009.35 ; C40.2@4677.44,5741.98 4681.04,5751.65 C40.2@4679.88,5751.65 ; C21.2@4762.91,5750.94 4762.29,5750.94 C21.2@4767.54,5741.98 ; C47.2@4879.44,4903.56 4877.74,4904.54 C47.2@4881,4904.54 ; v1(4956.77,5371.41) 4956.48,5370.83 v1@4961.17,5368.28 ; v1(4971.23,5101.65) 4972.44,5098.07 4981.25,5087.35 ; C29.2@4985.25,4899.71 C29.2@4985.25,4902.18 ; C32.2@5016.02,5462.07 5026.44,5468.62 C32.2@5026.44,5470.92 ; C28.2@5031.4,5006.39 5031.4,5004.51 C28.2@5031.42,5007.3 ; v1@5043.75,4899.71 v1(5043.75,4900) ; v1@5177.93,5659.78 v1(5178.21,5659.5)
  Secondary Component Side w30: C27.2@4170.72,4951.63 4180.72,4951.63 4170.72,4951.79 4170.49,4951.79 4170.49,5008.58 4171.16,5009.25 4171.38,5009.47 v1(4170.74,5009.15) ; C19.2@4259.54,5639.14 C19.2@4262.46,5637.24 4317.5,5637.24 4317.5,5637.42 v1(4317.94,5637.42) ; C38.2@4259.54,5720.46 C38.2@4261.75,5729.39 4312.25,5729.39 4312.25,5728.64 v1(4318.31,5728.64) ; v1(4267.64,5008.55) 4267.53,5008.55 4267.53,4951.63 C16.2@4272.64,4951.63 ; C35.2@4270,5079.32 4331,5079.32 v1(4331,5079) ; C14.2@4270,5169.33 4332,5169.33 v1(4332,5169) ; C15.2@4274.68,5259.84 4337,5259.84 v1(4337,5260) ; C37.2@4275.23,5441.37 4339,5441.37 4337.88,5442.49 4336.15,5442.49 v1(4336.01,5441.65) ; C36.2@4276.09,5350.63 4341,5350.63 v1(4341,5350) ; C18.2@4276.14,5531.47 4336.23,5531.47 v1(4336.29,5532.07) ; C50.2@4395.79,5734.24 4395.79,5672.28 4396.74,5672.28 v1(4396.74,5671.83) ; C20.2@4486.34,5733.33 4486.34,5670.94 v1(4486.85,5670.94) ; C25.2@4513.3,4944.11 4513.3,5009.35 v1(4513.32,5009.11) ; C17.2@4633.41,4940.58 4633.41,5000.43 v1(4633.95,5000.88) ; v1(4677.17,5677.9) 4677.44,5679.25 C40.2@4677.44,5741.98 ; C21.2@4767.54,5741.98 4767.54,5680.59 v1(4767.73,5678.35) ; C47.2@4881,4904.54 v1(4881,4969) ; v1(4940,5282) 4940,5281.39 C30.2@5001.28,5281.39 ; v1(4942,5192) C24.2@5000.55,5191.96 ; v1(4954,5643) 4954,5643.1 5016,5643.1 C33.2@5016,5642.14 ; v1(4954.3,5552.97) 4954.3,5552.62 C26.2@5015.57,5552.62 ; v1(4956.77,5371.41) 4956.48,5371.41 4956.48,5371.98 C23.2@5016.02,5371.98 ; v1(4958.51,5462.12) C32.2@5016.02,5462.07 ; v1(4971.23,5101.65) 4972.44,5101.49 C31.2@5030.96,5101.49 ; v1(4975.8,5007.12) 4980.56,5006.32 4980.62,5006.39 C28.2@5031.4,5006.39 ; C29.2@4984.87,4902.44 4985.25,4899.71 v1@5043.75,4899.71 ; v1(5051.88,5730.92) 5052.55,5730.92 C34.2@5052.55,5786.12 ; v1(5161.66,5730) 5161.66,5729.54 5161.76,5729.54 C22.2@5161.76,5790.67
  other v1: 3166.15,1686.51 2989.06,1687.5 2820.03,1715.32 3339.8,1725.67 2988.14,1738.99 3165.23,1747.19 3079.73,1796.83 3258.09,1797.75 2896.54,1799.04 2800,2293.75 2850,2293.75 2800,2343.75 2850,2343.75 5008.04,2374.98 4961.21,2381.71 5056.97,2382.31 4920.8,2408.65 5095.28,2410.44 4895.66,2441.57 5122.82,2447.55 4881,2485.26 5133.59,2493.04 4883.39,2531.35 5126.41,2546.91 4900.15,2576.24 5100.67,2586.42 4935.47,2607.37 5066.55,2617.54 4979.76,2625.92 5024.65,2627.72 3719.39,2723.22 3790.12,2762.19 3791.56,2825.71 5780,3897 5852,3897 5704,3899 5664,3931 5695,3981 5661,4026 5700.65,4067.58 5806.63,4086.5 5746.07,4087.26 5658.43,4095.74 5690.98,4136.61 5691,4196 5824,4239 5415,4247 5466,4246 5422.99,4419.68 5478.84,4420.87 5423.77,4473.47 5487.35,4476.49 3242.37,5513.52 3190.53,5514.53 3981.91,6782.82 4148.19,6791.02 4058.02,6853.08 104.5,8540.96 42,8542.79 -16.83,8566.69 161.49,8586.92 194.58,8642.07 198.26,8713.77 189.61,8788.16 263.14,8791.84 113.05,8815.29 325.65,8834.12 327.49,8916.85 329.32,8986.71 321.97,9060.25 173.06,9120.91 97.69,9122.75 253.95,9122.75
GND_24V_CMCHK: C41.2 D2.1 L2.2 T1.4 | length 143.6
  Primary Component Side w30: v1(2054.66,1062.19) 2054.67,1062.51 2056.25,1062.5 2131.25,1062.5 D2.1@2131.25,1056.25 ; v1(2276,1105) 2276,1045.5 C41.2@2277,1045.5
  other v1: 2052,197 2139,216 1975,237 1913.02,257.82 2061,273 2142,309 2076,344
GND_24VDC: C54.2 C60.3 C60.4 C62.1 C62.2 D7.1 L2.1 REG1.2 U17.2 U45.2 | length 72.8
  Primary Component Side w30: U17.2@1539.48,1109.51 1539.48,1093.74 v1(1596.55,1093.74)
  other v1: 1172.82,193.66 1243.75,193.75 1331.25,193.75 1406.25,193.75 1462.5,193.75 1518.75,231.25 645,232 511,239 1462.5,256.25 1243.95,261.02 1175,262.5 1317.58,287.73 1393.75,287.5 649,306 504,308 433,331 257.72,426.03 70.16,432.47 434,442 328,451 61,541 276,544 1026,604 954,690 957,778 1098,782
GND_PE: C51.3 C51.4 C57.3 C57.4 C61.1 C61.2 C62.3 C62.4 R33.1 R34.1 R35.1 R36.1 R45.1 R46.1 R47.1 R48.1 R49.1 U3.PE10 U3.PE12 U3.PE13 U4.1
  other v1: 319.22,39.19 399.77,39.93 500.45,39.93 700.34,39.93 799.53,39.93 900.22,39.93 1000.16,39.93 1100.1,39.93 1200.04,39.93 1299.24,39.93 1399.92,39.93 1499.87,39.93 1599.81,39.93 1700.49,39.93 1799.69,39.93 1899.63,39.19 2100.26,39.93 2200.2,39.93 2300.14,39.93 2399.34,39.93 2499.28,39.93 2599.96,39.93 3300.44,39.96 4000.43,39.66 4699.97,39.66 600.39,40.68 1998.83,40.68 2800.59,40.68 2900.53,40.68 3000.48,40.68 3099.67,40.68 3199.61,40.68 3501.07,40.71 3601.01,40.71 3700.95,40.71 3800.14,40.71 3900.08,40.71 4201.06,40.41 4301,40.41 4400.94,40.41 4500.14,40.41 4600.08,40.41 4900.59,40.41 5000.53,40.41 5100.48,40.41 5199.67,40.41 5299.61,40.41 2699.16,41.43 3399.63,41.45 4099.63,41.15 4799.16,41.15 88.76,42.17 169.3,42.17 237.92,42.17 1949,83.44 4049.8,83.91 4749.34,83.91 549.82,84.18 649.77,84.93 749.71,84.18 848.9,84.18 949.59,84.18 1049.53,84.18 1149.47,84.18 1249.41,84.18 1348.61,84.18 1449.29,84.18 1549.24,84.18 1649.18,84.18 1749.86,84.18 1849.06,84.18 2048.2,84.93 2149.63,84.18 2249.57,84.18 2349.51,84.18 2448.71,84.18 2548.65,84.18 2649.34,84.18 2849.96,84.93 2949.9,84.93 3049.85,84.93 3149.04,84.93 3248.98,84.93 3349.81,84.21 3550.44,84.95 3650.38,84.95 3750.32,84.95 3849.51,84.95 3949.46,84.95 4250.43,84.65 4350.37,84.65 4450.31,84.65 4549.51,84.65 4649.45,84.65 4949.96,84.65 5049.9,84.65 5149.85,84.65 5249.04,84.65 2748.53,85.67 3449,85.7 4149,85.4 4848.53,85.4 5279.27,137.41 5188,141
GND_PE11: C59.1 C59.2 U3.PE11
IOCS16: J1.D2 U11.145 | length 4635.8
  Primary Component Side w10.9: J1.D2@2750,3400 J1.D2@2762.5,3400 2812.5,3450 2893.75,3450 2912.5,3468.75 2912.5,3851.5 2913,3852 v1(2916.36,3848.64) ; v1(3008,6177) 3737.5,6177 3745.75,6168.75 4243.75,6168.75 4360.45,6052.05 U11.145@4360.45,5947.2
  Secondary Component Side w10.9: v1(2916.36,3848.64) 2956.25,3888.53 2956.25,4806.25 2987.5,4837.5 2987.5,5287.5 2768.75,5506.25 2768.75,5850 2968.75,6050 2968.75,6137.75 v1(3008,6177)
IORD: J1.B14 U11.150 | length 4143.9
  Primary Component Side w10.9: v1(2697,6069) 2697.25,6068.75 2825,6068.75 2856.25,6037.5 3562.5,6037.5 3593.75,6068.75 4193.75,6068.75 4261.95,6000.55 U11.150@4261.95,5947.2
  Secondary Component Side w10.9: J1.B14@2462.5,3700 2462.5,3812.5 2456.25,3818.75 2456.25,5828.25 v1(2697,6069)
IOWR: J1.B13 U11.151 | length 4024.4
  Primary Component Side w10.9: v1(2704.98,6022.74) 2821.01,6022.74 2831.25,6012.5 3575,6012.5 3600,6037.5 3825,6037.5 3831.25,6043.75 4187.5,6043.75 4242.25,5989 U11.151@4242.25,5947.2
  Secondary Component Side w10.9: J1.B13@2562.5,3700 2562.5,3831.25 2543.75,3850 2543.75,5862.5 2707.25,6026 v1(2704.98,6022.74)
IQ_I_SYN: U11.66 US3.13 | length 5669.4
  Primary Component Side w11: US3.13@4375,8821 4375,8881.25 v1(4400,8906.25) ; U11.66@5238.45,5108.6 5412.5,5108.6 5483.6,5037.5 5587.5,5037.5 5631.25,5081.25 5631.25,5243.75 5593.75,5281.25 5593.75,5606.25 5587.5,5612.5 5587.5,6387.5 5662.5,6462.5 v1(5662.5,6812.5)
  Secondary Component Side w11: v1(4400,8906.25) 4450,8856.25 4450,8462.5 4662.5,8250 5725,8250 5800,8175 5800,7131.25 5662.5,6993.75 v1(5662.5,6812.5)
IQ_O_ATP: JP1.2 JP1.4 JP1.6 JP1.8 JP1.10 JP1.12 R4.2 U11.26 | length 5098.1
  Primary Component Side w11: JP1.2@1481.25,2418.75 1481.25,2304.98 R4.2@1483.73,2304.98 ; v1(1654.29,2808.99) 1652.5,2810.78 1656.25,2814.53 1656.25,2945 1986.25,3275 2318.75,3275 2412.5,3368.75 2412.5,3812.5 2650,4050 3243.75,4050 3431.25,4237.5 4381.25,4237.5 4612.5,4468.75 4612.5,4600 4636.25,4623.75 U11.26@4636.25,4762.5
  Secondary Component Side w11: JP1.2@1481.25,2418.75 JP1.4@1481.25,2518.75 JP1.6@1481.25,2618.75 JP1.8@1481.25,2718.75 1481.25,2775 ; JP1.12@1481.25,2918.75 JP1.10@1481.25,2818.75 1481.25,2775 ; v1(1654.29,2808.99) 1613.65,2768.35 1510.9,2768.35 1504.25,2775 1481.25,2775
IQ_O_SYN: JP2.2 JP2.4 JP2.6 JP2.8 JP2.10 JP2.12 R7.2 U11.67 | length 6815.8
  Primary Component Side w11: R7.2@1226.25,2306.25 1224.43,2306.25 1224.43,2386.93 JP2.2@1256.25,2418.75 ; U11.67@5238.45,5128.3 5425,5128.3 5478.82,5074.48 5550.96,5074.48 v1(5556.22,5074.27)
  Secondary Component Side w11: JP2.2@1256.25,2418.75 JP2.4@1256.25,2518.75 JP2.6@1256.25,2618.75 JP2.8@1256.25,2718.75 JP2.10@1256.25,2818.75 JP2.12@1256.25,2918.75 1425,3087.5 4037.5,3087.5 4481.25,3531.25 5132,3531.25 5293.75,3693 5293.75,4524.25 5525,4755.5 5525,5043.06 v1(5556.22,5074.27)
IRQ9: J1.B4 JP1.1 JP2.1 | length 2900.6
  Primary Component Side w11: JP2.1@1356.25,2418.75 1406.25,2468.75 1531.25,2468.75 JP1.1@1581.25,2418.75 1650,2487.5 1650,2556.25 1781.25,2687.5 1781.25,2887.5 2043.75,3150 2462.5,3150 2631.25,3318.75 3181.25,3318.75 3412.5,3550 3412.5,3637.5 3462.5,3687.5 J1.B4@3462.5,3700
  Secondary Component Side w11: J1.B4@3456.25,3700 J1.B4@3462.5,3700
IRQ10: J1.D3 JP1.3 JP2.3 | length 1840.8
  Primary Component Side w11: JP2.3@1356.25,2518.75 1406.25,2568.75 1531.25,2568.75 JP1.3@1581.25,2518.75 1631.25,2568.75 1631.25,2618.75 1750,2737.5 1750,2906.25 2025,3181.25 2443.75,3181.25 J1.D3@2662.5,3400
IRQ11: J1.D4 JP1.5 JP2.5 | length 1666.5
  Primary Component Side w11: JP2.5@1356.25,2618.75 1406.25,2668.75 1531.25,2668.75 JP1.5@1581.25,2618.75 1718.75,2756.25 1718.75,2918.75 2012.5,3212.5 2375,3212.5 J1.D4@2562.5,3400
IRQ12: J1.D5 JP1.7 JP2.7 | length 1547
  Primary Component Side w11: JP2.7@1356.25,2718.75 1406.25,2768.75 1531.25,2768.75 JP1.7@1581.25,2718.75 1631.25,2718.75 1687.5,2775 1687.5,2931.25 2000,3243.75 2350,3243.75 2462.5,3356.25 J1.D5@2462.5,3400
IRQ14: J1.D7 JP1.11 JP2.11 | length 1187.3
  Primary Component Side w11: JP2.11@1356.25,2918.75 1406.25,2968.75 1531.25,2968.75 JP1.11@1581.25,2918.75 1581.25,2987.5 1931.25,3337.5 2200,3337.5 J1.D7@2262.5,3400